# EAGLE board main_esp_board (EAGLE 9.6.2)
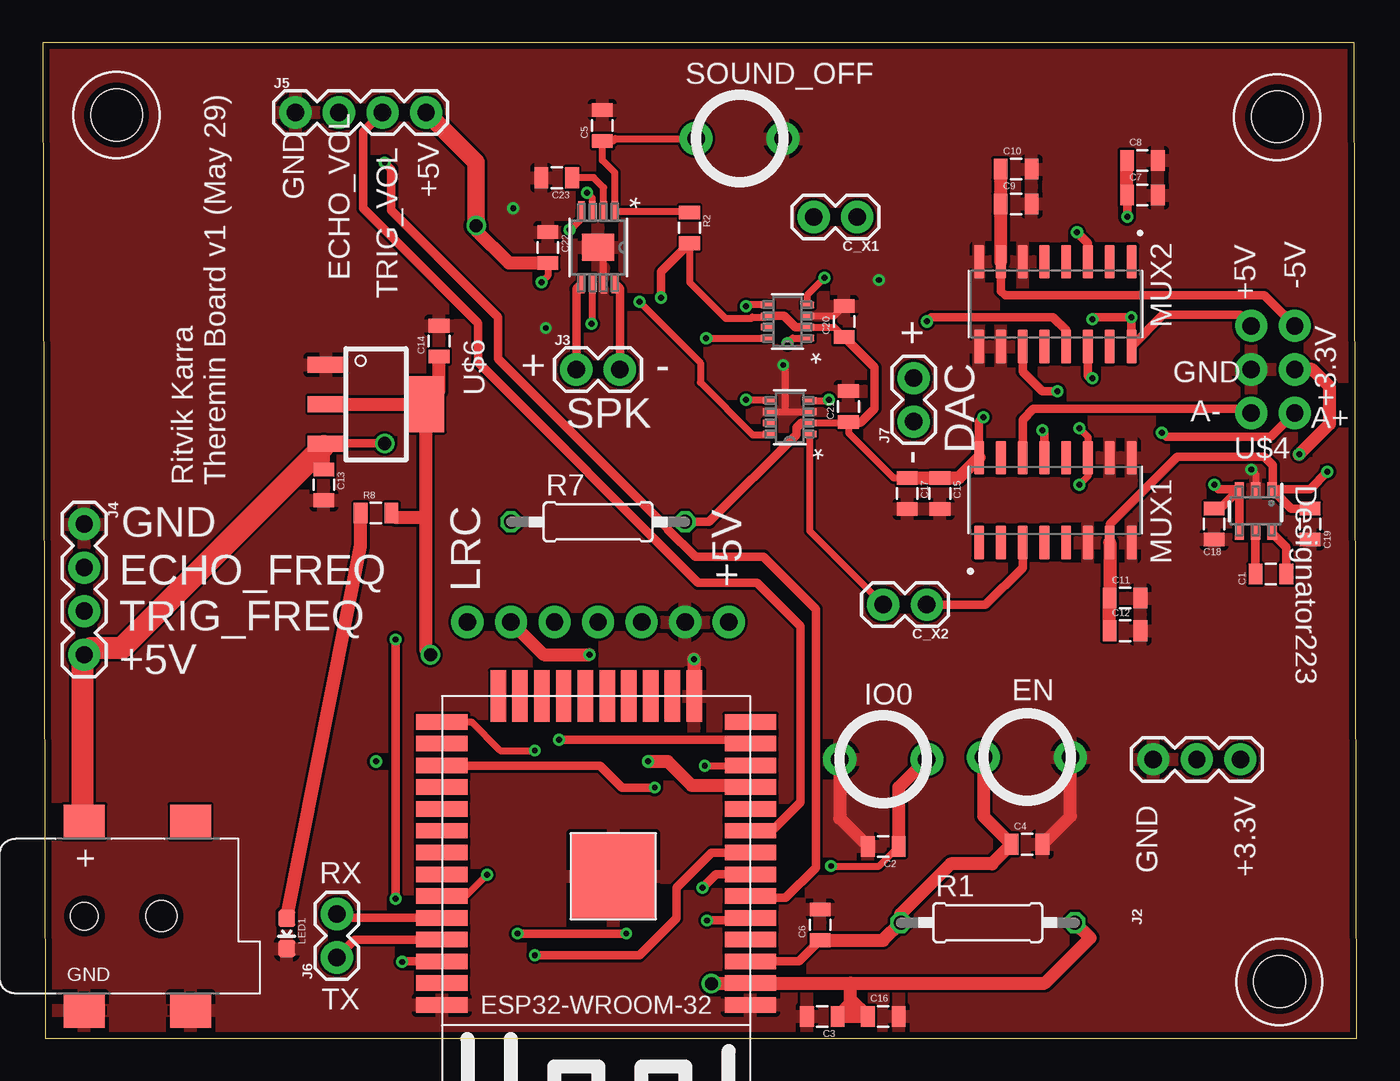
[diagram p0: board, top side]
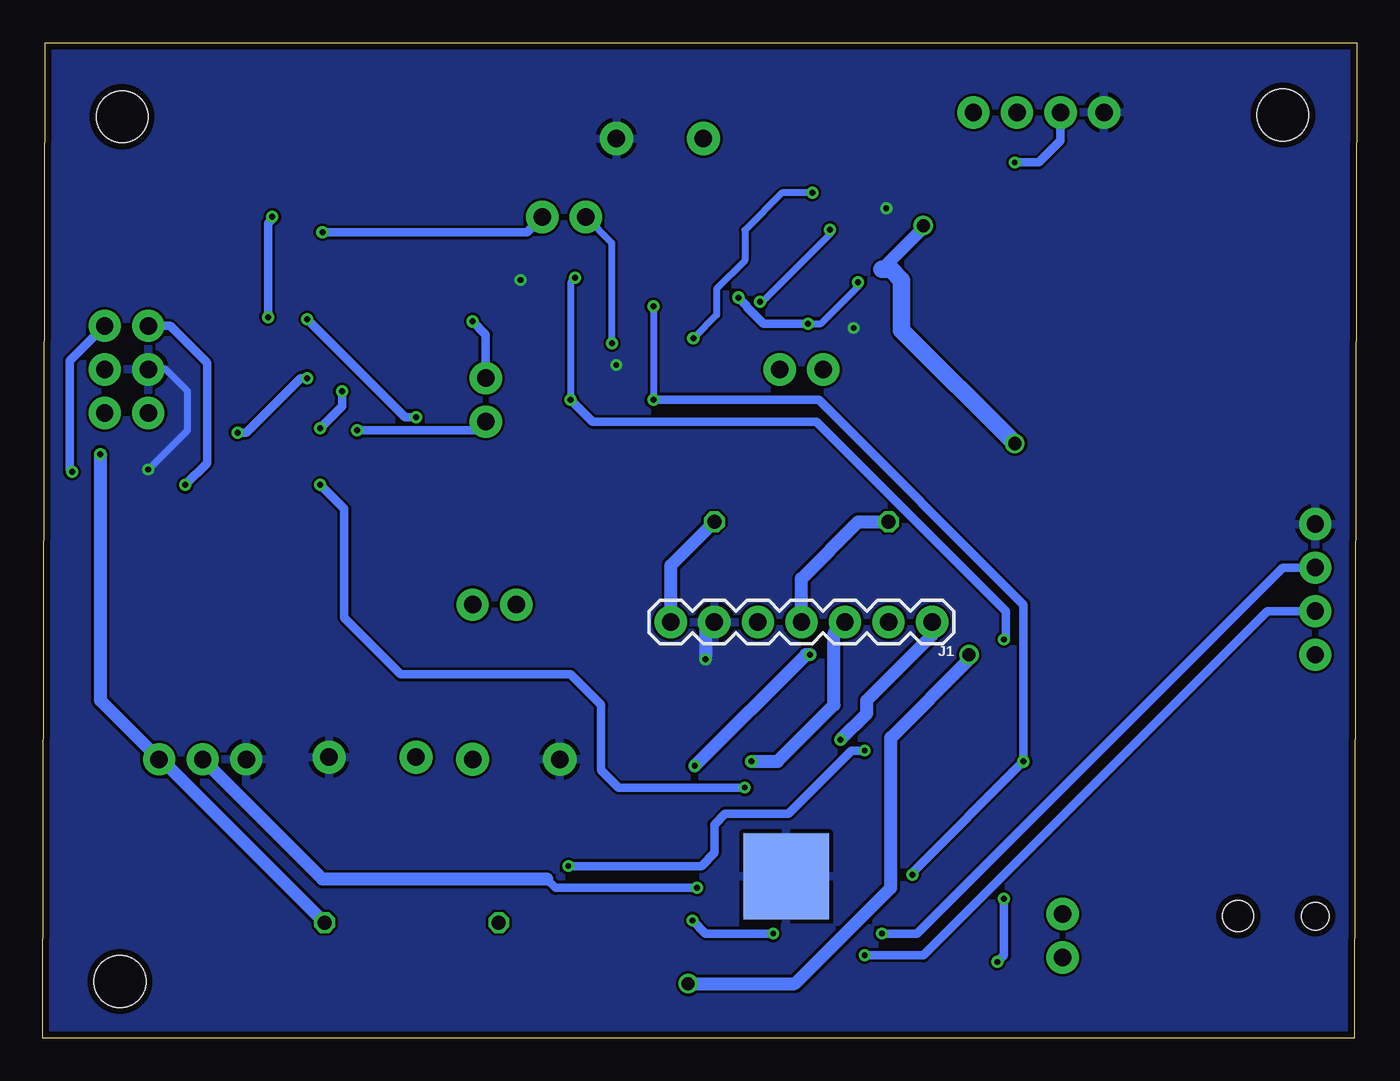
[diagram p1: board, bottom side, seen from below]

Size 76.63 x 58.03 mm. Coordinates in mm from the lower left corner, seen from the top.
Outline: 0.13,0 76.63,0 76.51,58.03 0,58.03 0.13,0
Copper layers (1*16): Top 0.0356mm / dielectric 1.5011mm / Bottom 0.0356mm
Design rules "LaenPCBOrder": minimum track width 6mil, minimum drill 13mil, track to track 6mil, track to pad 6mil, pad to pad 6mil, via to via 6mil, smd to smd 6mil, copper to edge 15mil, drill to drill 6mil, minimum pad ring 7mil, minimum via ring 7mil, stop-mask expansion 3mil, vias tented up to drill 0mil, thermal gap 10mil
Holes 3 mm at 72.01,53.72 72.14,3.3 4.3,53.82

## Footprints (pad centres in the part's own frame; a part is rotated, then mirrored left to right if it is on the bottom)
DGN8_1P89X1P57-L = smd 1.118 x 0.381: 1 -2.121,0.975; 2 -2.121,0.325; 3 -2.121,-0.325; 4 -2.121,-0.975; 5 2.121,-0.975; 6 2.121,-0.325; 7 2.121,0.325; 8 2.121,0.975 | smd 1.57 x 1.89: EPAD 0,0
0805 = smd 0.8 x 1.2: 1 -0.9,0; 2 0.9,0
1X02 = drill 1.016 pad 1.88: 1 0,0; 2 2.54,0
SOT23-8_ONS-L = smd 0.749 x 0.381: 1 -1.175,0.975; 2 -1.175,0.325; 3 -1.175,-0.325; 4 -1.175,-0.975; 5 1.175,-0.975; 6 1.175,-0.325; 7 1.175,0.325; 8 1.175,0.975
BTN_2 = drill 1.016 pad 1.93: P$1 -2.54,0; P$2 2.54,0
ESP32-WROOM = smd 3 x 0.9: 3V3 0,16.74; EN 0,15.47; GND1 0,18.01; GND3 18,18.01; IO0 18,1.5; IO4 18,2.77; IO5 18,6.58; IO12 0,1.5; IO14 0,2.77; IO16 18,4.04; IO17 18,5.31; IO18 18,7.85; IO19 18,9.12; IO21 18,11.66; IO22 18,15.47; IO23 18,16.74; IO25 0,6.58; IO26 0,5.31; IO27 0,4.04; IO32 0,9.12; IO33 0,7.85; IO34 0,11.66; IO35 0,10.39; NC 18,10.39; RX 18,12.93; SENSOR_VN 0,12.93; SENSOR_VP 0,14.2; TX 18,14.2 | smd 0.9 x 3: CLK 9.635,0; CMD 8.365,0; GND2 3.285,0; IO2 14.715,0; IO13 4.555,0; IO15 13.445,0; SD0 10.905,0; SD1 12.175,0; SD2 5.825,0; SD3 7.095,0 | smd 5 x 5: GND4 8,10.5 | smd 5 x 5 bottom: GND5 8,10.5
1X07 = drill 1.016 pad 1.88: 1 0,0; 2 2.54,0; 3 5.08,0; 4 7.62,0; 5 10.16,0; 6 12.7,0; 7 15.24,0
1X03 = drill 1.016 pad 1.88: 1 0,0; 2 2.54,0; 3 5.08,0
1X04 = drill 1.016 pad 1.88: 1 0,0; 2 2.54,0; 3 5.08,0; 4 7.62,0
LED-0603 = smd 1 x 1: A 0,-0.877; C 0,0.877
SOIC127P600X175-16N = smd 1.97 x 0.6: 1 -2.475,4.445; 2 -2.475,3.175; 3 -2.475,1.905; 4 -2.475,0.635; 5 -2.475,-0.635; 6 -2.475,-1.905; 7 -2.475,-3.175; 8 -2.475,-4.445; 9 2.475,-4.445; 10 2.475,-3.175; 11 2.475,-1.905; 12 2.475,-0.635; 13 2.475,0.635; 14 2.475,1.905; 15 2.475,3.175; 16 2.475,4.445
0207/10 = drill 0.813 octagon: 1 -5.08,0; 2 5.08,0
DBV0006A_L = smd 0.8 x 0.55: 1 -1.275,0.95; 2 -1.275,0; 3 -1.275,-0.95; 4 1.275,-0.95; 5 1.275,0; 6 1.275,0.95
2X3_0.1IN = drill 1.016 pad 1.88: 1 -2.54,-1.27; 2 -2.54,1.27; 3 0,-1.27; 4 0,1.27; 5 2.54,-1.27; 6 2.54,1.27
DCJACK_2MM_SMT = smd 2.4 x 2: GND -2.54,-5.5; GNDBREAK 3.66,-5.5; PWR1 -2.54,5.5; PWR2 3.66,5.5 | hole 1.6: -2.54,0 | hole 1.8: 1.96,0
R-PDSO-G4_TI = smd 0.95 x 2.15: 1 -2.3,-2.9; 2 0,-2.9; 3 2.3,-2.9 | smd 3.25 x 2.15: 4 0,2.9

## Placement (x,y rotation side)
AMPLIFIER  TPA6211A1TDGNRQ1DGN8_1P89X1P57-L  [DGN8_1P89X1P57-L]  32.39,46.1 270 top
C1  1 uF  [0805]  71.63,27.05 0 top
C2  0.1uF  [0805]  49.02,11.18 180 top
C3  22uF  [0805]  45.47,1.27 180 top
C4  0.1uF  [0805]  57.4,11.3 0 top
C5  0.1uF  [0805]  32.64,53.21 90 top
C6  0.1uF  [0805]  45.34,6.6 90 top
C7  0.1uF  [0805]  64.14,49.15 0 top
C8  1uF  [0805]  64.14,51.18 0 top
C9  0.1uF  [0805]  56.77,48.64 0 top
C10  1uF  [0805]  56.77,50.67 0 top
C11  0.1uF  [0805]  63.12,25.65 0 top
C12  1uF  [0805]  63.12,23.75 0 top
C13  1uF  [0805]  16.38,32.26 270 top
C14  1uF  [0805]  23.11,40.64 90 top
C15  0.1uF  [0805]  52.32,31.75 270 top
C16  0.1uF  [0805]  49.02,1.27 0 top
C17  1uF  [0805]  50.42,31.75 270 top
C18  2.2 uF  [0805]  68.33,29.97 270 top
C19  2.2 uF  [0805]  73.91,29.97 270 top
C20  0.1uF  [0805]  46.74,41.78 90 top
C21  0.1uF  [0805]  46.99,36.83 90 top
C22  1uF  [0805]  29.46,46.1 270 top
C23  0.22uF  [0805]  29.97,50.16 180 top
C_X1  0.16uF  [1X02]  47.5,47.88 180 top
C_X2  0.16uF  [1X02]  51.56,25.27 180 top
DIGIPOT1  CAT5171TBI-50GT3SOT23-8_ONS-L  [SOT23-8_ONS-L]  43.56,36.2 180 top
DIGIPOT2  CAT5171TBI-50GT3SOT23-8_ONS-L  [SOT23-8_ONS-L]  43.43,41.78 180 top
EN  SWITCH_BTN_NO  [BTN_2]  57.4,16.38 0 top
ESP32  ESP32-WROOM  [ESP32-WROOM]  41.28,19.94 180 top
IO0  SWITCH_BTN_NO  [BTN_2]  49.02,16.26 180 top
J1  [1X07]  24.76,24.26 180 bottom
J2  455-1750-1-ND  [1X03]  64.77,16.26 0 top
J3  SPEAKER  [1X02]  31.11,38.99 0 top
J4  [1X04]  2.41,29.97 270 top
J5  [1X04]  14.73,53.98 0 top
J6  [1X02]  17.14,4.7 90 top
J7  [1X02]  50.8,35.94 90 top
LED1  BLUE  [LED-0603]  14.22,6.1 180 top
MUX1  CD4051BM96  [SOIC127P600X175-16N]  59.06,31.37 90 top
MUX2  CD4051BM96  [SOIC127P600X175-16N]  59.06,42.8 270 top
R1  [0207/10]  55.12,6.73 0 top
R2  [0805]  37.72,47.24 270 top
R7  [0207/10]  32.39,30.1 0 top
R8  330R  [0805]  19.43,30.61 0 top
REGULATOR  LM2776DBVRDBV0006A_L  [DBV0006A_L]  70.74,30.73 270 top
SOUND_OFF  SWITCH_BTN_NO  [BTN_2]  40.64,52.45 0 top
U$4  2X3_PROG  [2X3_0.1IN]  71.76,38.99 270 top
U$5  BARREL_2.1MMSMT  [DCJACK_2MM_SMT]  4.95,7.11 0 top
U$6  VREG-3V3  [R-PDSO-G4_TI]  19.43,36.96 270 top

## Library data of the parts
AMPLIFIER = theremin; COPYRIGHT: Copyright (C) 2025 Ultra Librarian. All rights reserved.; MANUFACTURER_PART_NUMBER: TPA6211A1TDGNRQ1; MFR_NAME: Texas Instruments
C1-C23 EN IO0 LED1 R2 R8 SOUND_OFF U$4-U$6 = Ilya_Teach
C_X1 C_X2 J1 J3 J6 J7 = SparkFun-Connectors
DIGIPOT1 DIGIPOT2 = theremin; COPYRIGHT: Copyright (C) 2025 Ultra Librarian. All rights reserved.; MANUFACTURER_PART_NUMBER: CAT5171TBI-50GT3; MFR_NAME: onsemi
ESP32 = ESP32
J2 = SparkFun-Connectors; PROD_ID: XXX-00000
J4 J5 = SparkFun-Connectors; PROD_ID: CONN-09696
MUX1 MUX2 = CD4051BM96; MANUFACTURER: Texas Instruments; MAXIMUM_PACKAGE_HEIGHT: 1.75mm; PARTREV: I; STANDARD: IPC-7351B
R1 R7 = rcl; SPICEPREFIX: R
REGULATOR = theremin; COPYRIGHT: Copyright (C) 2025 Ultra Librarian. All rights reserved.; MANUFACTURER_PART_NUMBER: LM2776DBVR; MFR_NAME: Texas Instruments; REFDES: RefDes; TYPE: TYPE

## Nets
-VDD5V0: C9.1 C10.1 C11.1 C12.1 C19.1 MUX1.7 MUX2.7 REGULATOR.1 U$4.2
AMPLIFIER_+: C_X1.1 MUX2.3
AMPLIFIER_-: C_X2.1 MUX1.3
ANALOG+: MUX2.14 U$4.6
ANALOG-: MUX1.14 U$4.5
BCLK: ESP32.IO27 J1.2
DAC+: J7.2 MUX2.13
DAC-: J7.1 MUX1.13
DIN: ESP32.IO26 J1.3
ECHO_FREQ: ESP32.SENSOR_VN J4.2
ECHO_VOL: ESP32.IO34 J5.2
EN: C4.1 C6.1 EN.P$1 ESP32.EN R1.1
GAIN: J1.4 R7.1
GND: AMPLIFIER.7 AMPLIFIER.EPAD C2.2 C3.2 C4.2 C5.2 C6.2 C7.2 C8.2 C9.2 C10.2 C11.2 C12.2 C13.2 C14.2 C15.2 C16.2 C17.2 C18.2 C19.2 C20.2 C21.2 C22.1 C23.2 DIGIPOT1.3 DIGIPOT1.6 DIGIPOT2.3 EN.P$2 ESP32.GND1 ESP32.GND2 ESP32.GND3 ESP32.GND4 ESP32.GND5 IO0.P$2 J1.6 J2.1 J4.1 J5.1 LED1.C MUX1.6 MUX1.8 MUX1.9 MUX1.10 MUX2.6 MUX2.8 MUX2.9 MUX2.10 REGULATOR.2 SOUND_OFF.P$2 U$4.3 U$5.GND U$5.GNDBREAK U$6.1
IN+: AMPLIFIER.3 DIGIPOT2.8
IN-: AMPLIFIER.4 DIGIPOT1.8
IO0: C2.1 ESP32.IO0 IO0.P$1
LRC: ESP32.IO14 J1.1
N$1: C1.1 REGULATOR.5
N$2: C1.2 REGULATOR.6
N$3: AMPLIFIER.2 C23.1
N$6: C_X1.2 DIGIPOT2.1
N$7: C_X2.2 DIGIPOT1.1
N$8: LED1.A R8.1
POT_IN: ESP32.IO35 J2.2
RX: ESP32.RX J6.2
SCL: DIGIPOT1.4 DIGIPOT2.4 ESP32.IO22
SD: J1.5
SD_AMP: AMPLIFIER.1 C5.1 R2.1 SOUND_OFF.P$1
SDA: DIGIPOT1.5 DIGIPOT2.5 ESP32.IO21
SEL: ESP32.IO16 MUX1.11 MUX2.11
SPK+: AMPLIFIER.5 J3.1
SPK-: AMPLIFIER.8 J3.2
TRIG_FREQ: ESP32.IO32 J4.3
TRIG_VOL: ESP32.IO33 J5.3
TX: ESP32.TX J6.1
VDD3V3: C3.1 C14.1 C16.1 ESP32.3V3 J2.3 R1.2 R8.2 U$4.4 U$6.2 U$6.4
VDD5V0: AMPLIFIER.6 C7.1 C8.1 C13.1 C15.1 C17.1 C18.1 C20.1 C21.1 C22.2 DIGIPOT1.2 DIGIPOT2.2 DIGIPOT2.6 J1.7 J4.4 J5.4 MUX1.16 MUX2.16 R2.2 R7.2 REGULATOR.3 REGULATOR.4 U$4.1 U$5.PWR1 U$6.3

## Tracks (layer width: path | path; a pad name or v marks a point on that pad's centre or on a via)
-VDD5V0  (via drill 0.35)
  Top 0.508: MUX2.7 55.88,43.56 56.13,43.31 71.25,43.31 U$4.2 | v74.93,33.02 73.92,32.01 REGULATOR.1 | MUX1.7 62.23,29.97 66.17,33.91 71.25,33.91 71.76,33.4 71.76,32.08 REGULATOR.1 | C19.1 72.83,30.87 REGULATOR.1
  Top 0.762: C10.1 C9.1 55.88,48.63 MUX2.7 | C12.1 C11.1 62.23,25.66 MUX1.7
  Bottom 0.508: U$4.2 75.06,39.5 75.06,33.15 v74.93,33.02
AMPLIFIER_+  (via drill 0.35)
  Top 0.508: MUX2.3 60.96,46.35 v60.33,46.99
  Bottom 0.508: v60.33,46.99 48.39,46.99 C_X1.1
AMPLIFIER_-
  Top 0.508: C_X2.1 54.99,25.27 57.15,27.43 MUX1.3
ANALOG+  (via drill 0.35)
  Top 0.508: U$4.6 71.63,35.05 65.53,35.05 v65.28,35.31 | v61.21,38.48 61.09,38.48 60.96,38.61 MUX2.14
  Bottom 0.508: v65.28,35.31 64.77,35.31 61.59,38.48 v61.21,38.48
ANALOG-
  Top 0.508: U$4.5 70.23,36.7 57.79,36.7 57.15,36.07 MUX1.14
BCLK  (via drill 0.33, 0.35)
  Top 0.406: v38.61,15.88 41.25,15.88 ESP32.IO27
  Top 0.762: J1.2 29.21,22.35 v31.88,22.35
  Bottom 0.762: v31.88,22.35 32.13,22.35 v38.61,15.88
DAC+  (via drill 0.35)
  Top 0.508: v51.56,41.78 51.82,42.04 58.93,42.04 59.69,41.27 MUX2.13
  Bottom 0.508: J7.2 50.8,41.02 v51.56,41.78
DAC-  (via drill 0.35)
  Top 0.508: MUX1.13 58.42,35.31 v58.29,35.43
  Bottom 0.508: v58.29,35.43 51.31,35.43 J7.1
DIN  (via drill 0.35)
  Top 0.762: ESP32.IO26 41.17,14.73 37.85,14.73 36.45,16.13 v35.31,16.13
  Bottom 0.762: J1.3 30.48,23.62 30.48,19.43 33.78,16.13 v35.31,16.13
ECHO_FREQ  (via drill 0.33)
  Top 0.508: v27.69,6.1 v34.04,6.1 | v38.73,6.86 41.12,6.86 ESP32.SENSOR_VN
  Bottom 0.508: J4.2 4.32,27.43 25.65,6.1 v27.69,6.1 | v34.04,6.1 37.97,6.1 v38.73,6.86
ECHO_VOL  (via drill 0.33)
  Top 0.508: ESP32.IO34 41.37,8.19 43.32,8.19 45.08,9.95 45.08,25.02 42.04,28.07 38.06,28.07 36.45,29.68 36.45,29.72 26.54,39.62 26.54,42.04 20.32,48.26 20.32,50.67 v19.94,51.05
  Bottom 0.508: v19.94,51.05 18.54,51.05 17.27,52.32 J5.2
EN
  Top 0.508: ESP32.EN 44.1,4.47 C6.1
  Top 0.762: EN.P$1 54.86,12.94 C4.1 55.36,10.16 52.96,10.16 50.04,7.24 R1.1 49.01,5.7 C6.1
GAIN
  Bottom 0.762: J1.4 32.39,26.8 29.08,30.1 R7.1
GND  (via drill 0.33, 0.35)
  Top 0.406: DIGIPOT1.6 43.31,36.52 | 43.31,36.52 DIGIPOT1.3 | DIGIPOT2.3 46.16,42.11 C20.2 | 43.31,36.52 43.31,39.12 v43.18,39.24 | AMPLIFIER.7 32.71,45.78 AMPLIFIER.EPAD | v70.48,33.15 70.74,32.89 REGULATOR.2
  Top 0.762: v37.97,22.1 37.99,22.08 ESP32.GND2 | C4.2 59.94,12.94 EN.P$2 | IO0.P$2 46.48,12.82 C2.2
  Bottom 0.406: v70.48,33.15 68.2,35.43 68.2,37.72 69.47,38.99 U$4.3
  Bottom 0.762: J1.6 37.97,23.75 v37.97,22.1
  other vias: 48.77,44.2 29.34,41.4 27.43,48.39
  pour Top: -10.16,66.67 76.96,66.67 83.44,60.2 83.44,-0.25 75.82,-7.87 -5.84,-7.87 -14.35,0.64 -14.35,62.48
  pour Bottom: -11.05,68.2 86.74,68.2 94.11,60.83 89.15,55.88 89.15,-17.91 9.02,-17.91 -23.75,14.86 -23.75,55.5
IN+  (via drill 0.35)
  Top 0.406: v38.69,40.81 DIGIPOT2.8 | AMPLIFIER.3 32.06,48.98 v31.75,49.29
  Bottom 0.406: v31.75,49.29 33.52,49.29 35.69,47.12 35.69,45.34 37.34,43.69 37.34,42.16 v38.69,40.81
IN-  (via drill 0.35)
  Top 0.406: AMPLIFIER.4 31.41,47.76 30.78,47.13 v30.72,47.13 | v34.8,42.93 38.35,39.37 38.35,38.23 41.4,35.18 42.34,35.18 DIGIPOT1.8
  Bottom 0.406: v34.8,42.93 34.67,42.93 30.72,46.88 v30.72,47.13
IO0  (via drill 0.33)
  Top 0.406: ESP32.IO0 25,18.44 26.67,16.76 v28.7,16.76 | v45.97,10.03 48.78,10.03 C2.1
  Top 0.762: C2.1 49.92,14.62 IO0.P$1
  Bottom 0.508: v45.97,10.03 38.23,10.03 37.47,10.79 37.47,12.45 36.83,13.08 33.15,13.08 29.46,16.76 v28.7,16.76
LRC  (via drill 0.35)
  Top 0.508: ESP32.IO14 41.05,17.4 v30.1,17.4
  Bottom 0.762: J1.1 24.76,23.5 28.57,19.68 28.57,18.92 v30.1,17.4
N$1
  Top 0.508: C1.1 REGULATOR.5
N$2
  Top 0.508: REGULATOR.6 72.53,28.62 C1.2
N$3
  Top 0.406: AMPLIFIER.2 32.71,49.59 32.13,50.16 C23.1
N$6  (via drill 0.33)
  Top 0.406: v43.43,40.51 43.73,40.81 DIGIPOT2.1
  Bottom 0.406: v43.43,40.51 43.43,46.35 C_X1.2
N$7
  Top 0.406: C_X2.2 44.74,29.56 DIGIPOT1.1
N$8
  Top 0.762: LED1.A 18.53,28.7 R8.1
POT_IN  (via drill 0.35)
  Top 0.508: ESP32.IO35 39.27,9.55 v38.48,8.76
  Bottom 0.508: v38.48,8.76 46.74,8.76 47.24,9.27
  Bottom 0.762: 47.24,9.27 60.33,9.27 J2.2
RX
  Top 0.508: ESP32.RX 17.38,7.01 J6.2
SCL  (via drill 0.33, 0.35)
  Top 0.406: DIGIPOT1.4 45.81,37.17 v45.85,37.21 | DIGIPOT2.4 44.61,43.34 v45.59,44.32
  Top 0.508: v20.57,8.13 v20.57,23.24 | v20.96,4.44 20.98,4.47 ESP32.IO22
  Bottom 0.406: v45.59,44.32 45.85,44.07 v45.85,37.21
  Bottom 0.508: v45.85,37.21 44.58,35.94 31.5,35.94 20.45,24.89 20.45,23.37 v20.57,23.24 | v20.57,8.13 20.57,4.83 v20.96,4.44
SD_AMP
  Top 0.406: R2.1 37.64,48.22 AMPLIFIER.1 33.36,50.46 32.64,51.18 C5.1 33.26,52.31 33.4,52.45 SOUND_OFF.P$1
SDA  (via drill 0.33, 0.35)
  Top 0.406: DIGIPOT2.5 41.11,42.76 v41.02,42.67 | DIGIPOT1.5 42.34,37.21 v41.02,37.21 | ESP32.IO21 24.66,8.28 v25.91,9.53
  Bottom 0.406: v41.02,42.67 v41.02,37.21
  Bottom 0.508: v41.02,37.21 31.37,37.21 19.43,25.27 v19.43,16.13 25.91,9.65 v25.91,9.53
SEL  (via drill 0.33, 0.35)
  Top 0.406: v60.45,32.26 60.96,32.77 MUX1.11 60.96,35.05 v60.45,35.56
  Top 0.508: v59.18,37.72 58.29,37.72 57.15,38.86 MUX2.11 | ESP32.IO16 23.3,15.88 32.51,15.88 33.78,14.61 v35.69,14.61
  Bottom 0.508: v60.45,35.56 59.18,36.83 v59.18,37.72 | v60.45,32.26 59.06,30.86 59.06,24.51 55.75,21.21 45.85,21.21 44.07,19.43 44.07,15.62 43.05,14.61 v35.69,14.61
SPK+
  Top 0.508: AMPLIFIER.5 31.11,43.69 J3.1
SPK-
  Top 0.508: AMPLIFIER.8 33.66,43.69 J3.2
TRIG_FREQ  (via drill 0.33)
  Top 0.508: v28.7,4.83 34.8,4.83 36.96,6.98 36.96,8.76 39.01,10.82 ESP32.IO32
  Bottom 0.508: J4.3 5.21,24.89 25.27,4.83 v28.7,4.83
TRIG_VOL
  Top 0.508: J5.3 18.68,52.85 18.68,48.37 25.38,41.68 25.38,39.4 38.23,26.54 41.66,26.54 44.2,24 44.2,13.75 42.53,12.09 ESP32.IO33
TX
  Top 0.508: ESP32.TX 18.18,5.74 J6.1
VDD3V3  (via drill 0.35, 0.76)
  Top 0.762: U$6.2 U$6.4 | v73.28,34.04 75.06,35.81 75.06,37.97 74.04,38.99 U$4.4 | R1.2 61.09,5.84 58.44,3.2 47.12,3.2 | 47.12,3.2 ESP32.3V3 39.01,3.2 v38.99,3.17 | 47.12,2.28 C16.1 C3.1 47.12,2.02 47.12,2.28 | 47.12,2.28 47.12,3.2 | C14.1 23.1,37.73 U$6.4 | U$6.4 22.33,30.35 | 22.33,30.35 22.33,22.63 v22.61,22.35 | 22.33,30.35 20.58,30.35 R8.2
  Bottom 0.762: v73.28,34.04 73.28,19.68 J2.3 69.72,16.26 R1.2 | v22.61,22.35 22.61,22.1 27.18,17.53 27.18,8.76 32.77,3.17 v38.99,3.17
VDD5V0  (via drill 0.35, 0.76)
  Top 0.406: AMPLIFIER.6 32.06,41.71 v32,41.66 | v29.08,44.07 29.46,44.45 C22.2 | DIGIPOT2.2 46.16,41.46 C20.1 | DIGIPOT1.2 46.93,35.87 C21.1 46.99,35.3 49.64,32.65 C17.1 | R2.2 37.72,44.07 39.82,41.96 41.31,41.96 41.39,42.04 42.19,42.04 DIGIPOT2.6
  Top 0.508: U$4.1 69.85,42.16 65.34,42.16 MUX2.16 v63.5,42.04 61.34,42.04 v61.21,41.91 | v63.25,47.88 63.25,49.14 C7.1 | v54.86,36.2 54.61,35.94 MUX1.16 | v68.33,32.26 68.58,32.01 REGULATOR.3 | C18.1 68.65,30.87 REGULATOR.3 | REGULATOR.4 REGULATOR.3 | DIGIPOT1.2 44.25,35.87 43.95,35.58 43.95,35.19 38.86,30.1 R7.2 | C20.1 48.51,39.1 48.51,36.7 47.68,35.87 46.93,35.87 | v36.07,43.18 36.07,44.69 R2.2 | U$6.3 16.54,34.67 v19.94,34.67 | DIGIPOT2.6 43.24,42.11 43.89,41.46 DIGIPOT2.2
  Top 0.762: C7.1 C8.1 | MUX1.16 53.42,32.65 C15.1 C17.1 | C13.1 16.38,34.51 U$6.3 | v25.27,47.37 25.27,47.12 27.19,45.2 C22.2
  Top 1.016: J5.4 25.27,51.05 v25.27,47.37
  Top 1.27: U$5.PWR1 2.29,12.74 2.29,22.23 J4.4 2.79,22.73 4.61,22.73 16.38,34.51
  Bottom 0.406: v32,41.66 31.24,41.66 29.08,43.81 v29.08,44.07
  Bottom 0.508: v63.5,42.04 63.5,47.5 63.25,47.75 v63.25,47.88 | v61.21,41.91 55.5,36.2 v54.86,36.2 | U$4.1 69.22,41.53 67.06,39.37 67.06,33.53 v68.33,32.26 | v36.07,43.18 35.56,42.67 35.56,42.61 34.6,41.66 v32,41.66
  Bottom 0.762: J1.7 40,27.56 R7.2 | v25.27,47.37 25.21,47.31 27.69,44.83
  Bottom 1.016: v19.94,34.67 26.54,41.27 26.54,44.2 27.18,44.83 27.69,44.83

## Text on the board
tNames: TRIG_VOL | GND | +5V | -5V | ECHO_VOL | +5V | + | + | - | DAC | GND | +3.3V | A+ | SPK | A- | - | Ritvik Karra / Theremin Board v1 (May 29) | GND | ECHO_FREQ | +5V | LRC | TRIG_FREQ | +5V | GND | +3.3V | RX | TX